# EAGLE board FlightControllerBoard (EAGLE 9.0.0), part 1 of 2
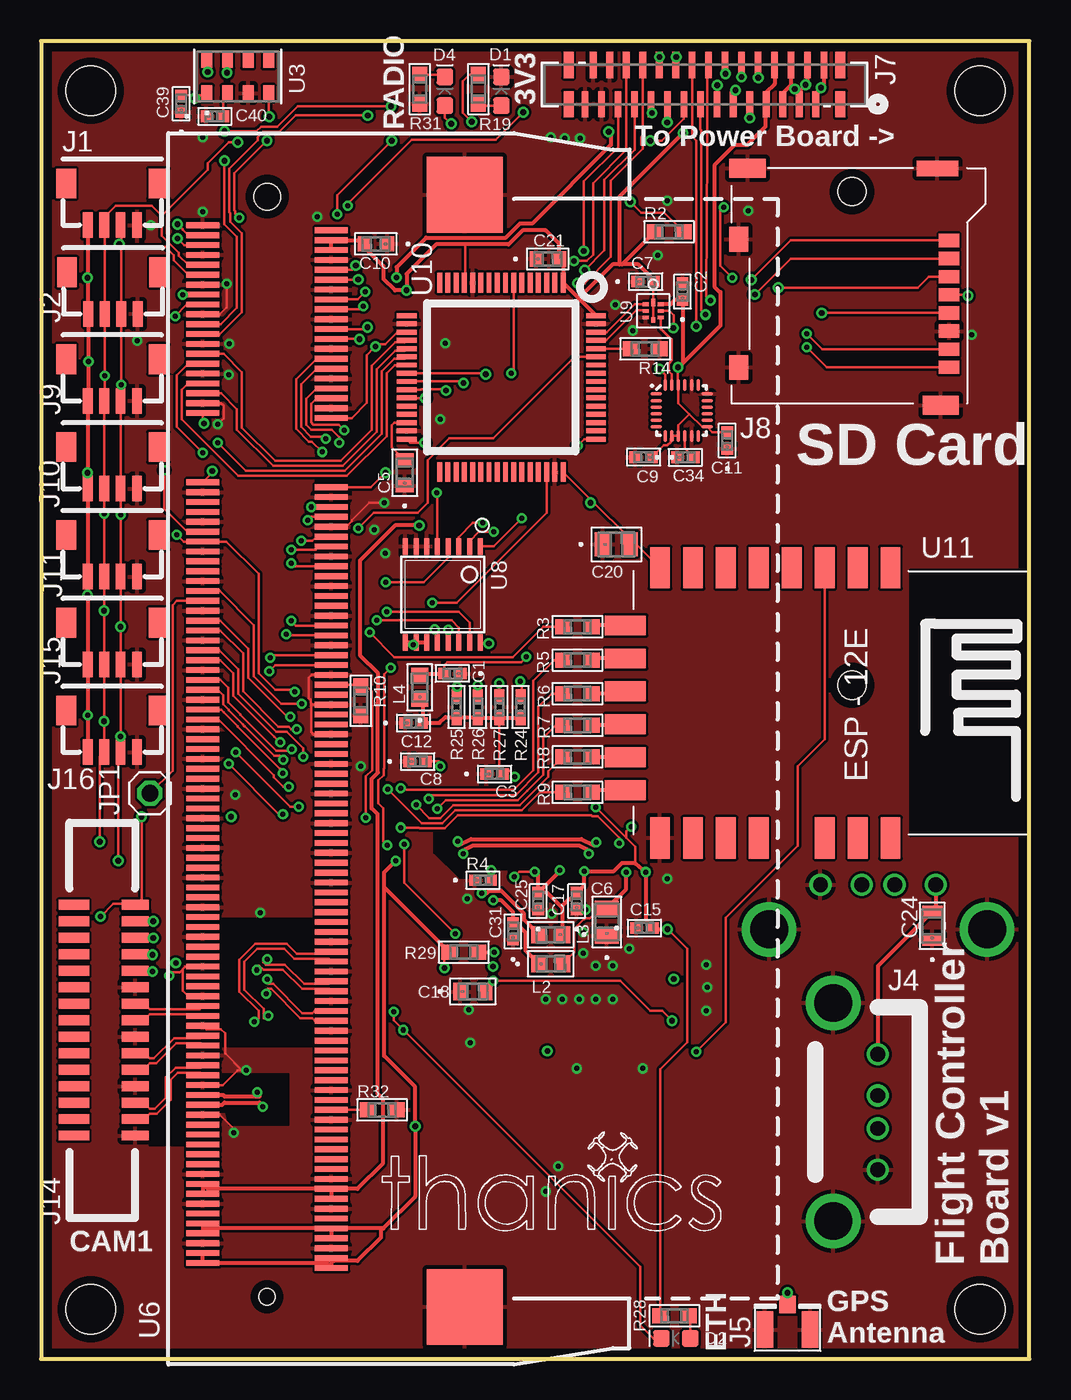
[diagram p0: board, top side]
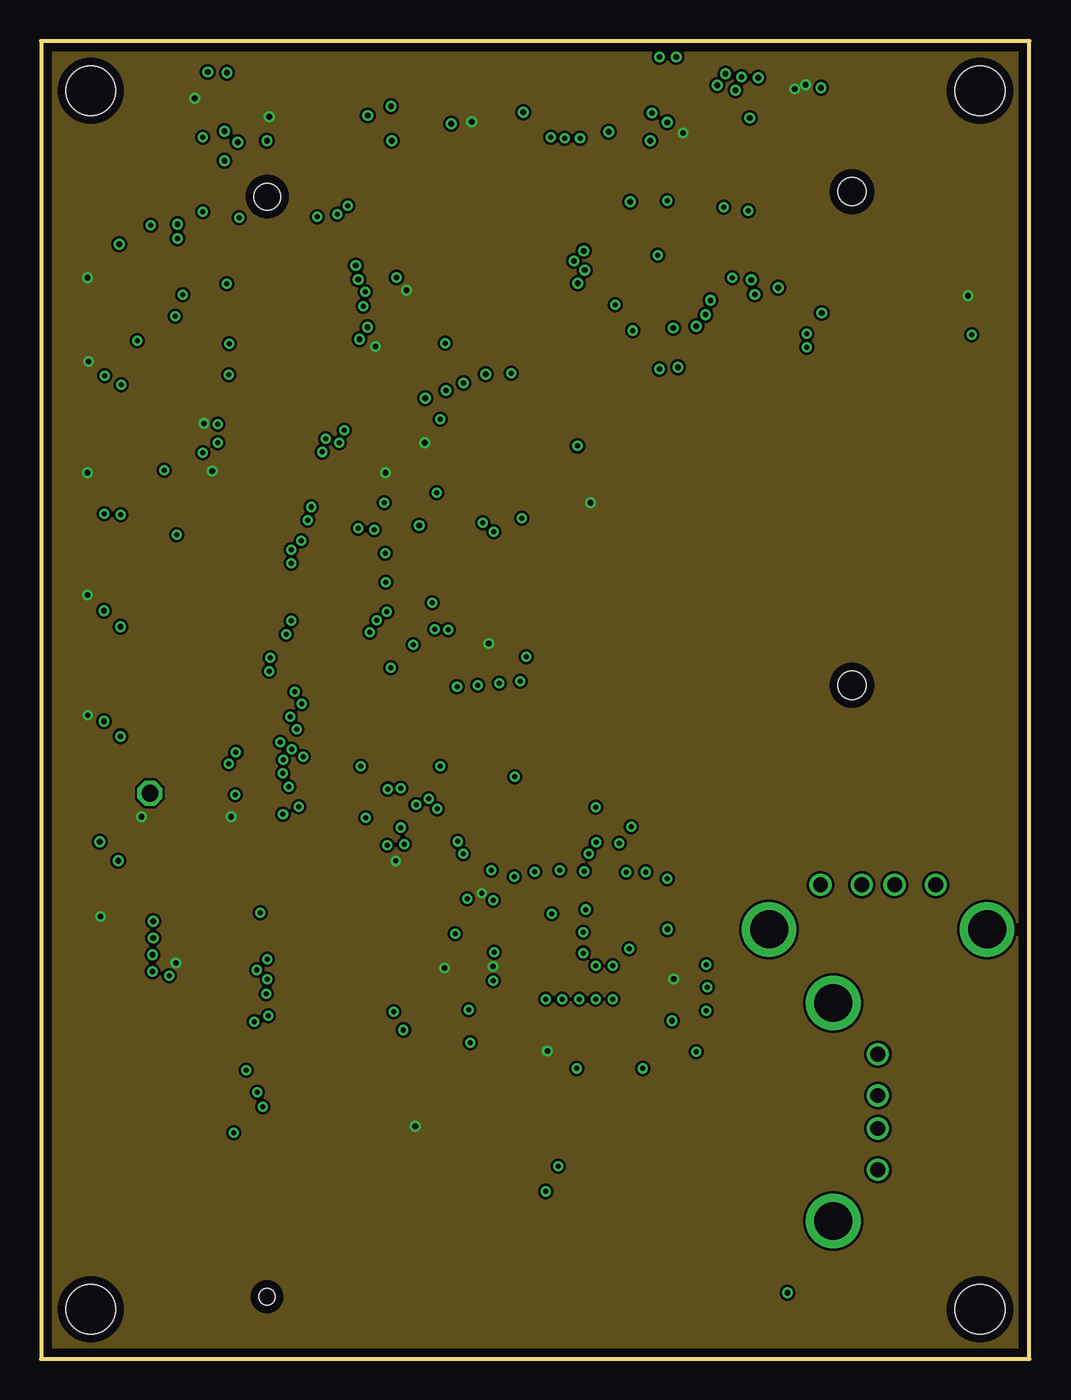
[diagram p1: board, inner layer Route2]
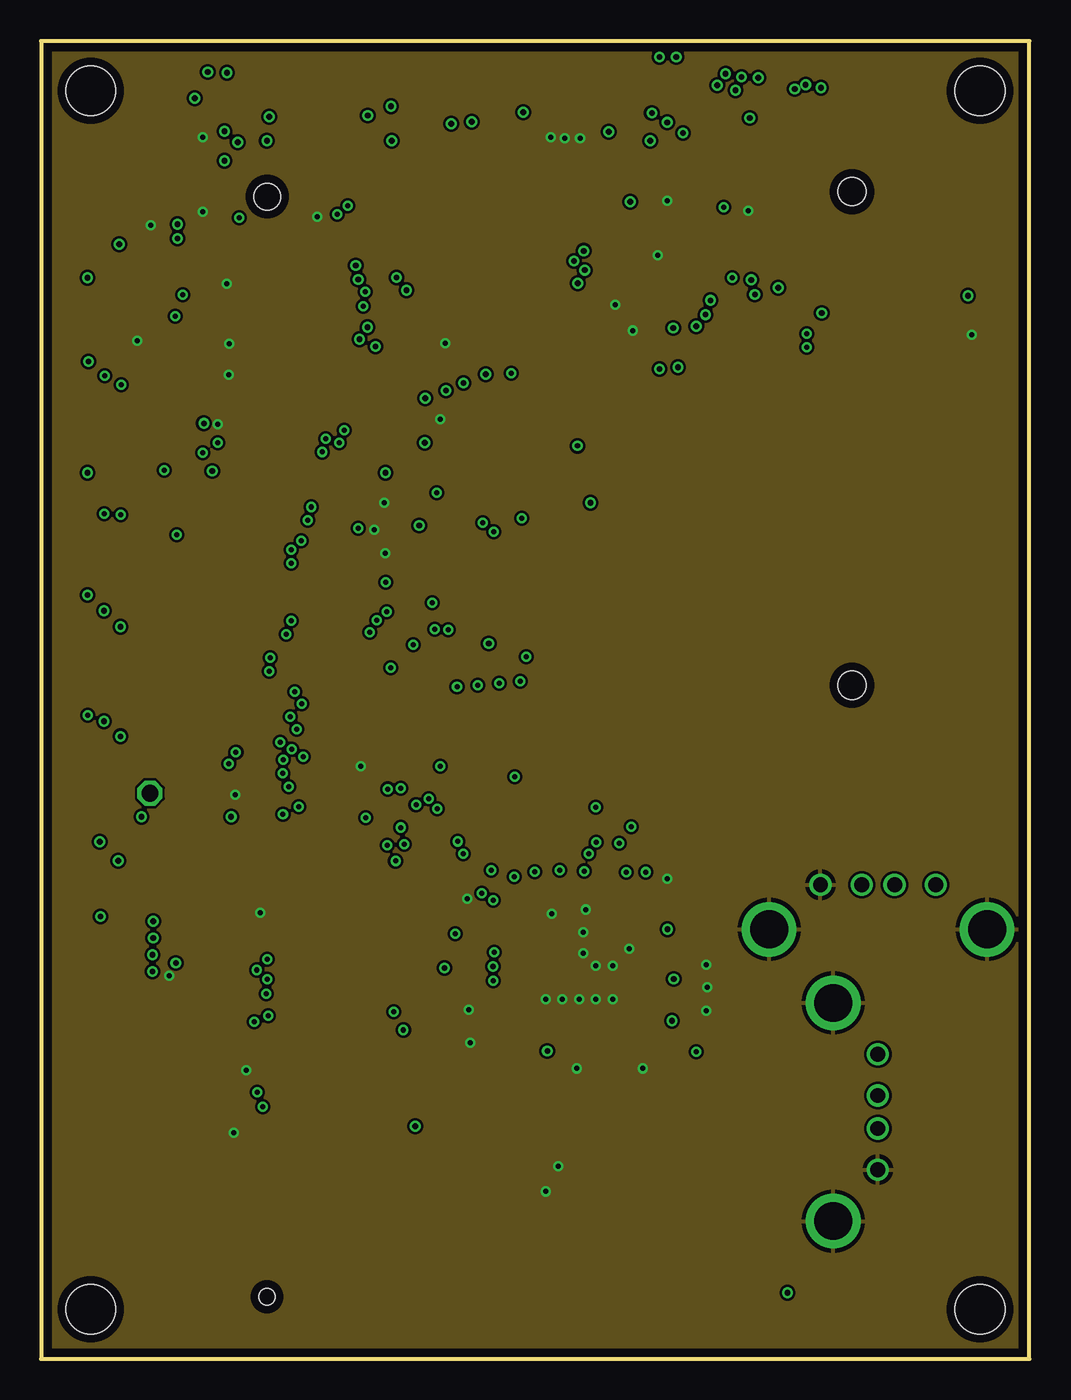
[diagram p2: board, inner layer Route15]
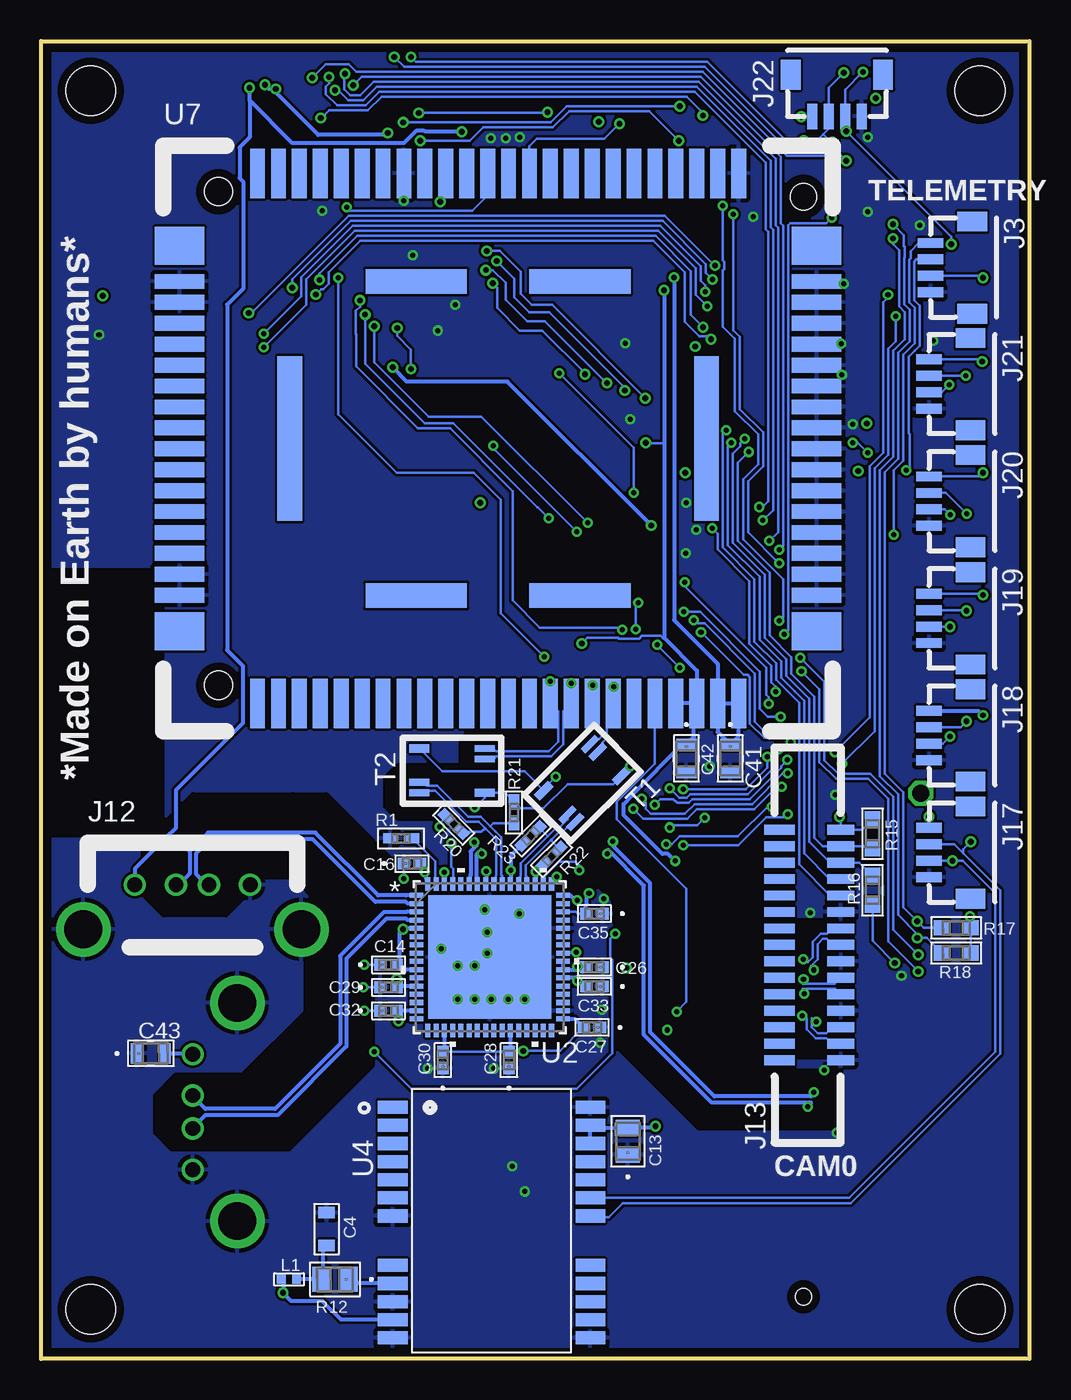
[diagram p3: board, bottom side, seen from below]

Size 60 x 80 mm. Coordinates in mm from the lower left corner, seen from the top.
Outline: 60,80 0,80 0,0 60,0 60,80
Copper layers (1*2*15*16): Top 0.035mm / dielectric 0.2mm / Route2 0.035mm / dielectric 1.2mm / Route15 0.035mm / dielectric 0.2mm / Bottom 0.035mm
Design rules "Elecrow_4-layer_PCB_eagle_rule": minimum track width 6mil, minimum drill 12mil, track to track 6mil, track to pad 6mil, pad to pad 6mil, via to via 8mil, smd to smd 0mil, copper to edge 20mil, drill to drill 10mil, minimum pad ring 6mil, minimum via ring 6mil, stop-mask expansion 0mil, vias tented up to drill 100mil, thermal gap 10mil
Holes 3 mm at 3,77 3,3 57,77 57,3

## Footprints (pad centres in the part's own frame; a part is rotated, then mirrored left to right if it is on the bottom)
0402-M = smd 0.711 x 0.711: 1 -0.508,0; 2 0.508,0
0603_CAPACITOR = smd 0.701 x 1.001: 1 -1.001,0; 2 1.001,0
0603-M = smd 0.813 x 1.067: 1 -0.775,0; 2 0.775,0
YAG_CC0805 = smd 0.965 x 1.448: 1 -0.826,0; 2 0.826,0
G-188-M = smd 0.813 x 0.914: 1 -0.699,0; 2 0.699,0
0805 = smd 0.965 x 1.448: 1 -0.826,0; 2 0.826,0
G-21 = smd 0.711 x 1.245: 1 -0.851,0; 2 0.851,0
LED-0603 = smd 1 x 1: A -0.877,0; C 0.877,0
JST_SH_4POS = smd 0.6 x 1.55: 1 -1.5,0; 2 -0.5,0; 3 0.5,0; 4 1.5,0 | smd 1.2 x 1.8: P$5 -2.8,2.525; P$6 2.8,2.525
USBA_RECEPT_VERT = drill 0.9: 1 -3.5,0; 2 -1,0; 3 1,0; 4 3.5,0 | drill 2.3: P$5 -6.62,-2.71; P$6 6.62,-2.71
U.FL = smd 2.2 x 1: P$1 0,1.375; P$2 0,-1.375 | smd 1.05 x 1: P$3 1.525,0
CON30_1X30_DUT_58XF = smd 0.406 x 1.6: 1 7.62,0.965; 2 7.12,-1.422; 3 6.62,0.965; 4 6.12,-1.422; 5 5.62,0.965; 6 5.12,-1.422; 7 4.62,0.965; 8 4.12,-1.422; 9 3.62,0.965; 10 3.12,-1.422; 11 2.62,0.965; 12 2.12,-1.422; 13 1.62,0.965; 14 1.12,-1.422; 15 0.62,0.965; 16 0.12,-1.422; 17 -0.38,0.965; 18 -0.88,-1.422; 19 -1.38,0.965; 20 -1.88,-1.422; 21 -2.38,0.965; 22 -2.88,-1.422; 23 -3.38,0.965; 24 -3.88,-1.422; 25 -4.38,0.965; 26 -4.88,-1.422; 27 -5.38,0.965; 28 -5.88,-1.422; 29 -6.38,0.965; 30 -6.88,-1.422 | smd 0.61 x 1.6: 31 -7.885,-1.422; 32 8.625,-1.422; 33 -7.885,0.965; 34 8.625,0.965
MICROSD = smd 0.8 x 1.24: 1 -4.4,0; 2 -3.3,0; 3 -2.2,0; 4 -1.1,0; 5 0,0; 6 1.1,0; 7 2.2,0; 8 3.3,0 | smd 0.95 x 2.5: 9 -8.775,-0.7 | smd 1.15 x 2.2: 10 5.615,-0.5; 11 -8.775,-12.23 | smd 1.5 x 1.15: 12 -4.47,-12.755; 13 3.31,-12.775
15POS_FFC_CONNECTOR = smd 0.6 x 1.65: 1 -6,-2; 2 -5,-2; 3 -4,-2; 4 -3,-2; 5 -2,-2; 6 -1,-2; 7 0,-2; 8 1,-2; 9 2,-2; 10 3,-2; 11 4,-2; 12 5,-2; 13 6,-2; 14 7,-2; 15 8,-2 | smd 0.6 x 1.85: P$16 -6,1.725; P$17 -5,1.725; P$18 -4,1.725; P$19 -3,1.725; P$20 -2,1.725; P$21 -1,1.725; P$22 0,1.725; P$23 1,1.725; P$24 2,1.725; P$25 3,1.725; P$26 4,1.725; P$27 5,1.725; P$28 6,1.725; P$29 7,1.725; P$30 8,1.725
1X01 = drill 1.016 octagon: 1 0,0
0402_INDUCTOR = smd 0.525 x 0.55: P$1 -0.463,0; P$2 0.463,0
IND_BLM18_0603-M = smd 0.914 x 1.041: 1 -0.724,0; 2 0.724,0
RC0402N-M = smd 0.864 x 0.61: 1 -0.66,0; 2 0.66,0
RC0603N-M = smd 0.965 x 0.914: 1 -0.876,0; 2 0.876,0
YAG_R0402-M = smd 0.66 x 0.66: 1 -0.508,0; 2 0.508,0
STA_RNCP0805-M = smd 1.118 x 1.499: 1 -0.826,0; 2 0.826,0
ALT4532 = smd 1.2 x 0.41: 1 -1.99,-1.35; 2 -1.99,-0.7; 4 1.99,1.35; 5 1.99,0.7 | smd 1.2 x 0.5: 3 -1.99,1.35; 6 1.99,-1.35
QFN40P300X300X105-25N = smd 0.7 x 0.2: 1 -1.55,1; 2 -1.55,0.6; 3 -1.55,0.2; 4 -1.55,-0.2; 5 -1.55,-0.6; 6 -1.55,-1; 13 1.55,-1; 14 1.55,-0.6; 15 1.55,-0.2; 16 1.55,0.2; 17 1.55,0.6; 18 1.55,1 | smd 0.2 x 0.7: 7 -1,-1.55; 8 -0.6,-1.55; 9 -0.2,-1.55; 10 0.2,-1.55; 11 0.6,-1.55; 12 1,-1.55; 19 1,1.55; 20 0.6,1.55; 21 0.2,1.55; 22 -0.2,1.55; 23 -0.6,1.55; 24 -1,1.55
QFN64_9X9MC-M = smd 0.813 x 0.305: 1 -4.445,3.75; 2 -4.445,3.25; 3 -4.445,2.75; 4 -4.445,2.25; 5 -4.445,1.75; 6 -4.445,1.25; 7 -4.445,0.75; 8 -4.445,0.25; 9 -4.445,-0.25; 10 -4.445,-0.75; 11 -4.445,-1.25; 12 -4.445,-1.75; 13 -4.445,-2.25; 14 -4.445,-2.75; 15 -4.445,-3.25; 16 -4.445,-3.75; 33 4.445,-3.75; 34 4.445,-3.25; 35 4.445,-2.75; 36 4.445,-2.25; 37 4.445,-1.75; 38 4.445,-1.25; 39 4.445,-0.75; 40 4.445,-0.25; 41 4.445,0.25; 42 4.445,0.75; 43 4.445,1.25; 44 4.445,1.75; 45 4.445,2.25; 46 4.445,2.75; 47 4.445,3.25; 48 4.445,3.75 | smd 0.305 x 0.813: 17 -3.75,-4.445; 18 -3.25,-4.445; 19 -2.75,-4.445; 20 -2.25,-4.445; 21 -1.75,-4.445; 22 -1.25,-4.445; 23 -0.75,-4.445; 24 -0.25,-4.445; 25 0.25,-4.445; 26 0.75,-4.445; 27 1.25,-4.445; 28 1.75,-4.445; 29 2.25,-4.445; 30 2.75,-4.445; 31 3.25,-4.445; 32 3.75,-4.445; 49 3.75,4.445; 50 3.25,4.445; 51 2.75,4.445; 52 2.25,4.445; 53 1.75,4.445; 54 1.25,4.445; 55 0.75,4.445; 56 0.25,4.445; 57 -0.25,4.445; 58 -0.75,4.445; 59 -1.25,4.445; 60 -1.75,4.445; 61 -2.25,4.445; 62 -2.75,4.445; 63 -3.25,4.445; 64 -3.75,4.445 | smd 7.493 x 7.493: 65 0,0
LGA8-M = smd 0.94 x 0.66: 1 -1.003,1.875; 2 -1.003,0.625; 3 -1.003,-0.625; 4 -1.003,-1.875; 5 1.003,-1.875; 6 1.003,-0.625; 7 1.003,0.625; 8 1.003,1.875
NEO-M8 = smd 1.8 x 0.8: 1 6.4,-7.4; 2 6.4,-6.3; 3 6.4,-5.2; 4 6.4,-4.1; 5 6.4,-3; 6 6.4,-1.9; 7 6.4,-0.8; 8 6.4,2.2; 9 6.4,3.3; 10 6.4,4.4; 11 6.4,5.5; 12 6.4,6.6; 13 -5.6,6.6; 14 -5.6,5.5; 15 -5.6,4.4; 16 -5.6,3.3; 17 -5.6,2.2; 18 -5.6,-0.8; 19 -5.6,-1.9; 20 -5.6,-3; 21 -5.6,-4.1; 22 -5.6,-5.2; 23 -5.6,-6.3; 24 -5.6,-7.4
SO-DIMM = smd 0.35 x 2: 1 -26.4,-3.9; 2 -26.1,3.9; 3 -25.8,-3.9; 4 -25.5,3.9; 5 -25.2,-3.9; 6 -24.9,3.9; 7 -24.6,-3.9; 8 -24.3,3.9; 9 -24,-3.9; 10 -23.7,3.9; 11 -23.4,-3.9; 12 -23.1,3.9; 13 -22.8,-3.9; 14 -22.5,3.9; 15 -22.2,-3.9; 16 -21.9,3.9; 17 -21.6,-3.9; 18 -21.3,3.9; 19 -21,-3.9; 20 -20.7,3.9; 21 -20.4,-3.9; 22 -20.1,3.9; 23 -19.8,-3.9; 24 -19.5,3.9; 25 -19.2,-3.9; 26 -18.9,3.9; 27 -18.6,-3.9; 28 -18.3,3.9; 29 -18,-3.9; 30 -17.7,3.9; 31 -17.4,-3.9; 32 -17.1,3.9; 33 -16.8,-3.9; 34 -16.5,3.9; 35 -16.2,-3.9; 36 -15.9,3.9; 37 -15.6,-3.9; 38 -15.3,3.9; 39 -15,-3.9; 40 -14.7,3.9; 41 -10.8,-3.9; 42 -10.5,3.9; 43 -10.2,-3.9; 44 -9.9,3.9; 45 -9.6,-3.9; 46 -9.3,3.9; 47 -9,-3.9; 48 -8.7,3.9; 49 -8.4,-3.9; 50 -8.1,3.9; 51 -7.8,-3.9; 52 -7.5,3.9; 53 -7.2,-3.9; 54 -6.9,3.9; 55 -6.6,-3.9; 56 -6.3,3.9; 57 -6,-3.9; 58 -5.7,3.9; 59 -5.4,-3.9; 60 -5.1,3.9; 61 -4.8,-3.9; 62 -4.5,3.9; 63 -4.2,-3.9; 64 -3.9,3.9; 65 -3.6,-3.9; 66 -3.3,3.9; 67 -3,-3.9; 68 -2.7,3.9; 69 -2.4,-3.9; 70 -2.1,3.9; 71 -1.8,-3.9; 72 -1.5,3.9; 73 -1.2,-3.9; 74 -0.9,3.9; 75 -0.6,-3.9; 76 -0.3,3.9; 77 0,-3.9; 78 0.3,3.9; 79 0.6,-3.9; 80 0.9,3.9; 81 1.2,-3.9; 82 1.5,3.9; 83 1.8,-3.9; 84 2.1,3.9; 85 2.4,-3.9; 86 2.7,3.9; 87 3,-3.9; 88 3.3,3.9; 89 3.6,-3.9; 90 3.9,3.9; 91 4.2,-3.9; 92 4.5,3.9; 93 4.8,-3.9; 94 5.1,3.9; 95 5.4,-3.9; 96 5.7,3.9; 97 6,-3.9; 98 6.3,3.9; 99 6.6,-3.9; 100 6.9,3.9; 101 7.2,-3.9; 102 7.5,3.9; 103 7.8,-3.9; 104 8.1,3.9; 105 8.4,-3.9; 106 8.7,3.9; 107 9,-3.9; 108 9.3,3.9; 109 9.6,-3.9; 110 9.9,3.9; 111 10.2,-3.9; 112 10.5,3.9; 113 10.8,-3.9; 114 11.1,3.9; 115 11.4,-3.9; 116 11.7,3.9; 117 12,-3.9; 118 12.3,3.9; 119 12.6,-3.9; 120 12.9,3.9; 121 13.2,-3.9; 122 13.5,3.9; 123 13.8,-3.9; 124 14.1,3.9; 125 14.4,-3.9; 126 14.7,3.9; 127 15,-3.9; 128 15.3,3.9; 129 15.6,-3.9; 130 15.9,3.9; 131 16.2,-3.9; 132 16.5,3.9; 133 16.8,-3.9; 134 17.1,3.9; 135 17.4,-3.9; 136 17.7,3.9; 137 18,-3.9; 138 18.3,3.9; 139 18.6,-3.9; 140 18.9,3.9; 141 19.2,-3.9; 142 19.5,3.9; 143 19.8,-3.9; 144 20.1,3.9; 145 20.4,-3.9; 146 20.7,3.9; 147 21,-3.9; 148 21.3,3.9; 149 21.6,-3.9; 150 21.9,3.9; 151 22.2,-3.9; 152 22.5,3.9; 153 22.8,-3.9; 154 23.1,3.9; 155 23.4,-3.9; 156 23.7,3.9; 157 24,-3.9; 158 24.3,3.9; 159 24.6,-3.9; 160 24.9,3.9; 161 25.2,-3.9; 162 25.5,3.9; 163 25.8,-3.9; 164 26.1,3.9; 165 26.4,-3.9; 166 26.7,3.9; 167 27,-3.9; 168 27.3,3.9; 169 27.6,-3.9; 170 27.9,3.9; 171 28.2,-3.9; 172 28.5,3.9; 173 28.8,-3.9; 174 29.1,3.9; 175 29.4,-3.9; 176 29.7,3.9; 177 30,-3.9; 178 30.3,3.9; 179 30.6,-3.9; 180 30.9,3.9; 181 31.2,-3.9; 182 31.5,3.9; 183 31.8,-3.9; 184 32.1,3.9; 185 32.4,-3.9; 186 32.7,3.9; 187 33,-3.9; 188 33.3,3.9; 189 33.6,-3.9; 190 33.9,3.9; 191 34.2,-3.9; 192 34.5,3.9; 193 34.8,-3.9; 194 35.1,3.9; 195 35.4,-3.9; 196 35.7,3.9; 197 36,-3.9; 198 36.3,3.9; 199 36.6,-3.9; 200 36.9,3.9 | smd 4.6 x 4.6: G1 -28.254,12; G2 39.27,12 | hole 1.6: -28.15,0 | hole 0.965: 38.65,0
PDDL2450_SOCKET = smd 0.9 x 3: 1 14.605,16.09; 2 13.335,16.09; 3 12.065,16.09; 4 10.795,16.09; 5 9.525,16.09; 6 8.255,16.09; 7 6.985,16.09; 8 5.715,16.09; 9 4.445,16.09; 10 3.175,16.09; 11 1.905,16.09; 12 0.635,16.09; 13 -0.635,16.09; 14 -1.905,16.09; 15 -3.175,16.09; 16 -4.445,16.09; 17 -5.715,16.09; 18 -6.985,16.09; 19 -8.255,16.09; 20 -9.525,16.09; 21 -10.795,16.09; 22 -12.065,16.09; 23 -13.335,16.09; 24 -14.605,16.09; 41 -14.605,-16.09; 42 -13.335,-16.09; 43 -12.065,-16.09; 44 -10.795,-16.09; 45 -9.525,-16.09; 46 -8.255,-16.09; 47 -6.985,-16.09; 48 -5.715,-16.09; 49 -4.445,-16.09; 50 -3.175,-16.09; 51 -1.905,-16.09; 52 -0.635,-16.09; 53 0.635,-16.09; 54 1.905,-16.09; 55 3.175,-16.09; 56 4.445,-16.09; 57 5.715,-16.09; 58 6.985,-16.09; 59 8.255,-16.09; 60 9.525,-16.09; 61 10.795,-16.09; 62 12.065,-16.09; 63 13.335,-16.09; 64 14.605,-16.09 | smd 3 x 0.9: 25 -19.34,9.53; 26 -19.34,8.26; 27 -19.34,6.99; 28 -19.34,5.72; 29 -19.34,4.45; 30 -19.34,3.18; 31 -19.34,1.91; 32 -19.34,0.64; 33 -19.34,-0.63; 34 -19.34,-1.9; 35 -19.34,-3.17; 36 -19.34,-4.44; 37 -19.34,-5.71; 38 -19.34,-6.98; 39 -19.34,-8.25; 40 -19.34,-9.52; 65 19.34,-9.52; 66 19.34,-8.25; 67 19.34,-6.98; 68 19.34,-5.71; 69 19.34,-4.44; 70 19.34,-3.17; 71 19.34,-1.9; 72 19.34,-0.63; 73 19.34,0.64; 74 19.34,1.91; 75 19.34,3.18; 76 19.34,4.45; 77 19.34,5.72; 78 19.34,6.99; 79 19.34,8.26; 80 19.34,9.53 | smd 1.5 x 10: EP1 -12.65,0; EP2 12.65,0 | smd 6.15 x 1.5: EP3 -4.975,9.53; EP4 4.975,9.53; EP5 -4.975,-9.53; EP6 4.975,-9.53 | smd 3 x 2.3: P$7 -19.34,11.7; P$8 -19.34,-11.7; P$9 19.34,11.7; P$10 19.34,-11.7 | hole 1.7: -16.97,14.985; -16.97,-14.985
TSSOP16 = smd 0.305 x 0.991: 1 -2.275,-2.918; 2 -1.625,-2.918; 3 -0.975,-2.918; 4 -0.325,-2.918; 5 0.325,-2.918; 6 0.975,-2.918; 7 1.625,-2.918; 8 2.275,-2.918; 9 2.275,2.918; 10 1.625,2.918; 11 0.975,2.918; 12 0.325,2.918; 13 -0.325,2.918; 14 -0.975,2.918; 15 -1.625,2.918; 16 -2.275,2.918
8-UMLP = smd 0.45 x 0.22: 1 -0.5,0 | smd 0.22 x 0.35: 2 -0.4,-0.45; 3 0,-0.45; 4 0.4,-0.45; 6 0.4,0.45; 7 0,0.45; 8 -0.4,0.45 | smd 0.35 x 0.22: 5 0.55,0
LQFP64 = smd 1.2 x 0.3: 1 -5.75,3.75; 2 -5.75,3.25; 3 -5.75,2.75; 4 -5.75,2.25; 5 -5.75,1.75; 6 -5.75,1.25; 7 -5.75,0.75; 8 -5.75,0.25; 9 -5.75,-0.25; 10 -5.75,-0.75; 11 -5.75,-1.25; 12 -5.75,-1.75; 13 -5.75,-2.25; 14 -5.75,-2.75; 15 -5.75,-3.25; 16 -5.75,-3.75; 33 5.75,-3.75; 34 5.75,-3.25; 35 5.75,-2.75; 36 5.75,-2.25; 37 5.75,-1.75; 38 5.75,-1.25; 39 5.75,-0.75; 40 5.75,-0.25; 41 5.75,0.25; 42 5.75,0.75; 43 5.75,1.25; 44 5.75,1.75; 45 5.75,2.25; 46 5.75,2.75; 47 5.75,3.25; 48 5.75,3.75 | smd 0.3 x 1.2: 17 -3.75,-5.75; 18 -3.25,-5.75; 19 -2.75,-5.75; 20 -2.25,-5.75; 21 -1.75,-5.75; 22 -1.25,-5.75; 23 -0.75,-5.75; 24 -0.25,-5.75; 25 0.25,-5.75; 26 0.75,-5.75; 27 1.25,-5.75; 28 1.75,-5.75; 29 2.25,-5.75; 30 2.75,-5.75; 31 3.25,-5.75; 32 3.75,-5.75; 49 3.75,5.75; 50 3.25,5.75; 51 2.75,5.75; 52 2.25,5.75; 53 1.75,5.75; 54 1.25,5.75; 55 0.75,5.75; 56 0.25,5.75; 57 -0.25,5.75; 58 -0.75,5.75; 59 -1.25,5.75; 60 -1.75,5.75; 61 -2.25,5.75; 62 -2.75,5.75; 63 -3.25,5.75; 64 -3.75,5.75
ESP12E-SMD = smd 2.5 x 1.2: ADC -8.3,3.8; CH_PD -8.3,1.8; GND 8.1,-8.2; GPIO0 8.1,-2.2; GPIO2 8.1,-4.2; GPIO5 8.1,1.8; GPIO12 -8.3,-4.2; GPIO13 -8.3,-6.2; GPIO14 -8.3,-2.2; GPIO15 8.1,-6.2; GPIO16 -8.3,-0.2; RESET -8.3,5.8; RXD0 8.1,3.8; TXD0 8.1,5.8; VCC -8.3,-8.2 | smd 1.2 x 2.5: CS0 -4.8,-10.3; GPIO9 -0.8,-10.3; GPIO10 1.2,-10.3; MISO -2.8,-10.3; MOSI 3.2,-10.3; SCLK 5.2,-10.3

## Placement (x,y rotation side)
C1  0.1uF  [0402-M]  24.97,41.61 180 top
C2  0.1uF  [0402-M]  38.94,64.8 90 top
C3  0.1uF  [0402-M]  27.53,35.51 0 top
C4  10nF  [0603_CAPACITOR]  42.67,7.87 270 bottom
C5  4.7uF  [0603-M]  22.07,53.8 90 top
C6  1uF  [YAG_CC0805]  34.34,26.52 90 top
C7  0.1uF  [0402-M]  36.7,65.41 0 top
C8  0.1uF  [0402-M]  22.86,36.27 0 top
C9  0.1uF  [0402-M]  36.58,54.74 180 top
C10  2.2uF  [G-188-M]  20.32,67.69 180 top
C11  0.1uF  [0402-M]  41.66,55.75 90 top
C12  0.1uF  [0402-M]  22.61,38.61 0 top
C13  0.1uF  [0805]  24.38,13.21 90 bottom
C14  0.1uF  [0402-M]  38.91,23.93 0 bottom
C15  0.1uF  [0402-M]  36.63,26.16 0 top
C16  0.1uF  [0402-M]  37.49,30.07 0 bottom
C17  0.1uF  [0402-M]  32.51,27.79 90 top
C18  4.7uF  [0603-M]  26.21,22.3 0 top
C20  0.1uF  [0805]  34.92,49.45 0 top
C21  2.2uF  [G-188-M]  30.76,66.78 0 top
C24  22uF  [G-21]  54.1,26.29 90 top
C25  0.1uF  [0402-M]  30.18,27.79 90 top
C26  0.1uF  [0402-M]  26.42,23.77 180 bottom
C27  0.1uF  [0402-M]  26.57,20.12 180 bottom
C28  0.1uF  [0402-M]  31.6,18.14 90 bottom
C29  0.1uF  [0402-M]  38.91,22.56 0 bottom
C30  0.1uF  [0402-M]  35.61,18.14 90 bottom
C31  0.1uF  [0402-M]  28.65,25.96 90 top
C32  0.1uF  [0402-M]  38.91,21.13 0 bottom
C33  0.1uF  [0402-M]  26.42,22.61 180 bottom
C34  0.1uF  [0402-M]  39.12,54.74 0 top
C35  0.1uF  [0402-M]  26.42,27.03 180 bottom
C39  0.1uF  [0402-M]  8.51,76.2 90 top
C40  0.1uF  [0402-M]  10.54,75.44 0 top
C41  22uF  [G-21]  18.16,36.45 270 bottom
C42  10uF  [G-21]  20.83,36.45 270 bottom
C43  22uF  [G-21]  53.34,18.54 0 bottom
D1  GREEN  [LED-0603]  27.94,76.96 90 top
D2  GREEN  [LED-0603]  38.53,1.24 180 top
D4  GREEN  [LED-0603]  24.51,76.96 90 top
J1  [JST_SH_4POS]  4.32,68.83 0 top
J2  [JST_SH_4POS]  4.37,63.45 0 top
J3  [JST_SH_4POS]  5.99,66.25 270 bottom
J4  UE27AE54100  [USBA_RECEPT_VERT]  50.8,14.99 270 top
J5  U.FL  [U.FL]  45.31,1.78 90 top
J7  62674-301121ALF  [CON30_1X30_DUT_58XF]  39.9,77.6 0 top
J8  MICROSD  [MICROSD]  55.12,63.5 270 top
J9  [JST_SH_4POS]  4.32,58.17 0 top
J10  [JST_SH_4POS]  4.32,52.83 0 top
J11  [JST_SH_4POS]  4.32,47.5 0 top
J12  UE27AE54100  [USBA_RECEPT_VERT]  50.82,28.79 0 bottom
J13  [15POS_FFC_CONNECTOR]  13.46,24.13 90 bottom
J14  [15POS_FFC_CONNECTOR]  3.71,19.56 90 top
J15  [JST_SH_4POS]  4.32,42.16 0 top
J16  [JST_SH_4POS]  4.32,36.83 0 top
J17  [JST_SH_4POS]  6.1,30.73 270 bottom
J18  [JST_SH_4POS]  6.1,37.85 270 bottom
J19  [JST_SH_4POS]  6.1,44.96 270 bottom
J20  [JST_SH_4POS]  6.1,52.07 270 bottom
J21  [JST_SH_4POS]  6.1,59.18 270 bottom
J22  [JST_SH_4POS]  11.68,75.44 0 bottom
JP1  [1X01]  6.6,34.34 90 top
L1  27 nH  [0402_INDUCTOR]  44.96,4.83 0 bottom
L2  FB  [IND_BLM18_0603-M]  30.94,23.98 0 top
L3  FB  [IND_BLM18_0603-M]  30.94,25.76 180 top
L4  1k@100MHz  [IND_BLM18_0603-M]  22.99,40.77 90 top
R1  12k  [RC0402N-M]  38.15,31.6 180 bottom
R2  10k  [RC0603N-M]  38.13,68.43 0 top
R3  20R  [RC0603N-M]  32.56,44.45 180 top
R4  12.4k  [YAG_R0402-M]  26.82,29.06 0 top
R5  20R  [RC0603N-M]  32.56,42.42 180 top
R6  20R  [RC0603N-M]  32.56,40.39 180 top
R7  20R  [RC0603N-M]  32.56,38.46 180 top
R8  20R  [RC0603N-M]  32.56,36.55 180 top
R9  20R  [RC0603N-M]  32.56,34.39 180 top
R10  10k  [RC0603N-M]  19.41,39.95 270 top
R12  10R  [STA_RNCP0805-M]  42.16,4.83 180 bottom
R14  10k  [RC0603N-M]  36.68,61.32 180 top
R15  1k  [RC0603N-M]  9.53,31.88 270 bottom
R16  1k  [RC0603N-M]  9.53,28.45 90 bottom
R17  1k  [RC0603N-M]  4.45,26.16 180 bottom
R18  1k  [RC0603N-M]  4.45,24.64 180 bottom
R19  1k  [RC0603N-M]  26.54,77.09 90 top
R20  49R9  [RC0402N-M]  34.95,32.46 315 bottom
R21  49R9  [RC0402N-M]  31.29,33.17 270 bottom
R22  49R9  [RC0402N-M]  29.01,30.51 45 bottom
R23  49R9  [RC0402N-M]  30.28,31.75 45 bottom
R24  49R9  [RC0402N-M]  29.11,39.57 90 top
R25  49R9  [RC0402N-M]  25.22,39.57 90 top
R26  49R9  [RC0402N-M]  26.52,39.57 90 top
R27  49R9  [RC0402N-M]  27.81,39.57 90 top
R28  1k  [RC0603N-M]  38.46,2.62 180 top
R29  10k  [RC0603N-M]  25.65,24.69 180 top
R31  1k  [RC0603N-M]  22.99,77.09 270 top
R32  10k  [RC0603N-M]  20.7,15.11 0 top
T1  ALT4532M  [ALT4532]  27.13,34.95 225 bottom
T2  ALT4532M  [ALT4532]  35.05,35.71 180 bottom
U1  [QFN40P300X300X105-25N]  38.89,57.58 0 top
U2  [QFN64_9X9MC-M]  32.77,24.38 0 bottom
U3  MPL115A2  [LGA8-M]  11.94,77.85 90 top
U4  NEO-M8  [NEO-M8]  32.26,7.87 180 bottom
U6  [SO-DIMM]  13.72,42.42 270 top
U7  PDDL2450  [PDDL2450_SOCKET]  32.26,55.88 0 bottom
U8  74HC4053  [TSSOP16]  24.38,46.41 180 top
U9  [8-UMLP]  37.16,63.63 270 top
U10  [LQFP64]  27.94,59.59 270 top
U11  [ESP12E-SMD]  45.77,39.73 270 top

## Library data of the parts
C1-C3 C7-C9 C11 C12 C14-C17 C25-C35 C39 C40 = 0.1uF-capacitor-0402; MANUFACTURER_PART_NUMBER: 0402ZD104KAT2A; VENDOR: AVX Corporation
C4 J1-J4 J8-J22 L1 T1 T2 U7-U10 = thanics_robotics
C5 C18 = 4.7uF-capacitor; MANUFACTURER_PART_NUMBER: 06036D475KAT2A; VENDOR: AVX Corporation
C6 = 1uF X7R Ceramic Capacitor; COPYRIGHT: Copyright C 2015 Accelerated Designs. All rights reserved; MANUFACTURER_PART_NUMBER: CC0805KKX7R7BB105; VENDOR: Vendor
C10 C21 = 2.2uF X5R Capacitor; COPYRIGHT: Copyright C 2015 Accelerated Designs. All rights reserved; MANUFACTURER_PART_NUMBER: GRM188R61C225KE15J; VENDOR: Vendor
C13 C20 = 0.1uF X7R Ceramic Capacitor; COPYRIGHT: Copyright C 2015 Accelerated Designs. All rights reserved; MANUFACTURER_PART_NUMBER: 08055C104KAT2A; VENDOR: Vendor
C24 C41 C43 = 22uF X5R Ceramic Capacitor; COPYRIGHT: Copyright C 2015 Accelerated Designs. All rights reserved; MANUFACTURER_PART_NUMBER: GRM21BR60J226ME39L; VENDOR: Vendor
C42 = 10uF X5R Ceramic Capacitor; COPYRIGHT: Copyright C 2015 Accelerated Designs. All rights reserved; MANUFACTURER_PART_NUMBER: GRM21BR60J106ME19L; VENDOR: Vendor
D1 D2 D4 = SparkFun-LED; PROD_ID: DIO-00821
J5 = SparkFun-Connectors; PROD_ID: CONN-09193; SF_ID: WRL-09144
J7 = 30pin_ffc_connector; MANUFACTURER_PART_NUMBER: 62674301121ALF; VENDOR: FCI
JP1 = pinhead
L2-L4 = 600ohm-fb; MANUFACTURER_PART_NUMBER: BLM18AG601SN1D; VENDOR: MURATA
R1 = 12k-resistor; MANUFACTURER_PART_NUMBER: RC0402FR0712KL; VENDOR: Yageo
R2 R10 R14 R29 R32 = 10k-resistor(0603); MANUFACTURER_PART_NUMBER: RC0603JR0710KL; VENDOR: Yageo
R3 R5-R9 = 20-resistor; MANUFACTURER_PART_NUMBER: RC0603JR0720RL; VENDOR: Yageo
R4 = 12.4k-resistor; MANUFACTURER_PART_NUMBER: RC0402FR0712K4L; VENDOR: Yageo
R12 = 10-resistor; COPYRIGHT: Copyright C 2015 Accelerated Designs. All rights reserved; MANUFACTURER_PART_NUMBER: RNCP0805FTD10R0; VENDOR: Vendor
R15-R19 R28 R31 = 1k-resistor; CASE: 0603 1608 metric; COMPOSITION: Thick Film; COPYRIGHT: Copyright C 2015 Accelerated Designs. All rights reserved; DATASHEET: httpwww.yageo.comdocumentsrecentPYuRC0603_51_RoHS_L_4.pdf; DESCRIPTION: RES 1.0K OHM 110W 5% 0603 SMD; DIGIKEYPARTNUMBER: 3111.0KGRTRND; HEIGHT: 0.022" 0.55mm; LEADSTYLE: Surface Mount SMD SMT; MANUFACTURER_PART_NUMBER: RC0603JR071KL; NEWARKPARTNUMBER: 14M7231; NUMBEROFTERMINATIONS: 2; PACKAGECASE: 0603 1608 Metric; PACKAGING: Tape &amp Reel TR; POWERWATTS: 0.1W 110W; QUANTITY_AVAILABLE: 0; RESISTANCEINOHMS: 1.00K; RESISTANCEOHMS: 1K; SIZEDIMENSION: 0.063" L x 0.031" W 1.60mm x 0.80mm; TEMPERATURECOEFFICIENT: 100ppm°C; TOLERANCE: 5%; VENDOR: Yageo; VOLTAGEWORKING: 50V
R20-R27 = 49.9-resistor; MANUFACTURER_PART_NUMBER: RC0402FR0749K9L; VENDOR: Yageo
U1 = ICM-20948-mpu
U2 = lan9512; MANUFACTURER_PART_NUMBER: LAN9512JZX; VENDOR: MICROCHIP
U3 = mpl115a1-barometer
U4 = ubloxLib
U6 = raspberrypi_cm
U11 = esp8266modules

## Nets
1.8V: C2.1 C9.1 C11.2 J7.7 J7.8 U1.8 U1.9 U1.13 U1.22 U6.183 U6.184 U6.185 U6.186 U9.8
3.3V_A: C8.2 C14.2 C15.2 C16.2 C17.2 C25.2 L3.1 R20.1 R21.1 R22.1 R23.1 R28.2 T1.3 T2.3 U2.5 U2.10 U2.49 U2.51 U2.54 U2.57 U2.64
+3V3: C7.2 C10.2 C13.2 C20.2 C21.2 C26.2 C27.2 C28.2 C29.2 C30.2 C35.2 C39.2 C42.1 J1.1 J2.1 J3.3 J7.3 J7.4 J7.5 J7.6 J8.4 J9.1 J10.1 J11.1 J13.15 J14.15 J15.1 J16.1 J17.1 J18.1 J19.1 J20.1 J21.1 J22.1 L3.2 R2.1 R15.1 R16.1 R17.1 R18.1 R19.2 R29.2 U2.11 U2.12 U2.19 U2.27 U2.33 U2.39 U2.40 U2.46 U3.1 U3.4 U4.22 U4.23 U6.4 U6.6 U6.39 U6.40 U6.41 U6.42 U6.191 U6.192 U6.193 U6.194 U6.197 U6.198 U6.199 U6.200 U7.61 U7.62 U8.16 U9.1 U9.5 U10.1 U10.13 U10.19 U10.32 U10.48 U10.64 U11.VCC
+5V: C24.2 C41.1 C43.2 J4.1 J7.1 J7.2 J12.1 U7.63 U7.64
C0_C_N: J13.8 U6.144
C0_C_P: J13.9 U6.142
C0_D0_N: J13.2 U6.138
C0_D0_P: J13.3 U6.136
C0_D1_N: J13.5 U6.150
C0_D1_P: J13.6 U6.148
C0_IO0: J13.11 U6.36
C0_IO1: J13.12 U6.34
C1_C_N: J14.8 U6.149
C1_C_P: J14.9 U6.147
C1_D0_N: J14.2 U6.161
C1_D0_P: J14.3 U6.159
C1_D1_N: J14.5 U6.155
C1_D1_P: J14.6 U6.153
C1_IO0: J14.11 U6.78
C1_IO1: J14.12 U6.76
EMMC_DISABLE_N: U6.2
ETH_BIAS: C1.2 L4.2 U7.13
GEAR: JP1.1 U6.65
GND: C1.1 C2.2 C3.1 C4.1 C5.1 C6.1 C7.1 C8.1 C9.2 C10.1 C11.1 C12.1 C13.1 C14.1 C15.1 C16.1 C17.1 C18.1 C20.1 C21.1 C24.1 C25.1 C26.1 C27.1 C28.1 C29.1 C30.1 C31.1 C32.1 C33.1 C34.1 C35.1 C39.1 C40.1 C41.2 C42.2 C43.1 D1.C J1.4 J2.4 J3.4 J4.4 J4.P$5 J4.P$6 J5.P$1 J5.P$2 J7.27 J7.28 J7.29 J7.30 J8.6 J8.9 J8.10 J8.11 J8.12 J8.13 J9.4 J10.4 J11.4 J12.4 J12.P$5 J12.P$6 J13.1 J13.4 J13.7 J13.10 J14.1 J14.4 J14.7 J14.10 J15.4 J16.4 J17.4 J18.4 J19.4 J20.4 J21.4 J22.4 R1.2 R4.1 R10.2 R14.1 R31.2 R32.2 U1.11 U1.18 U1.20 U2.34 U2.44 U2.65 U3.3 U4.7 U4.10 U4.12 U4.13 U4.24 U6.1 U6.7 U6.8 U6.13 U6.14 U6.19 U6.20 U6.25 U6.26 U6.31 U6.32 U6.37 U6.38 U6.43 U6.44 U6.49 U6.50 U6.55 U6.56 U6.61 U6.62 U6.67 U6.68 U6.73 U6.74 U6.79 U6.80 U6.85 U6.86 U6.91 U6.92 U6.97 U6.98 U6.103 U6.104 U6.109 U6.110 U6.115 U6.116 U6.121 U6.122 U6.127 U6.133 U6.134 U6.139 U6.140 U6.145 U6.146 U6.151 U6.152 U6.157 U6.163 U6.164 U6.169 U6.170 U6.181 U6.182 U6.187 U6.188 U6.195 U6.196 U6.G1 U6.G2 U7.1 U7.17 U7.25 U7.26 U7.39 U7.40 U7.65 U7.66 U7.67 U7.68 U7.69 U7.70 U7.71 U7.72 U7.73 U7.74 U7.75 U7.76 U7.77 U7.78 U7.79 U7.80 U8.6 U8.7 U8.8 U9.4 U10.12 U10.18 U10.31 U10.47 U10.63 U11.GND
GND1: D2.C U7.60
GPCLK1: R10.1 U2.61 U6.82
GPIO12: U6.45
GPIO13: U6.47
GPIO16: U6.57
GPIO17: U6.59
GPIO37: U6.60
GPIO38: U6.64
GPIO39: U6.66
I2C_MPU_SCL: U9.3 U10.61
I2C_MPU_SDA: U9.2 U10.62
I2C_SCL: J1.3 J2.3 J7.20 J9.3 J10.3 J11.3 J15.3 J16.3 J17.3 J18.3 J19.3 J20.3 J21.3 J22.3 U3.8 U4.19 U6.11
I2C_SCL_1V8: U1.23 U9.6
I2C_SDA: J1.2 J2.2 J7.19 J9.2 J10.2 J11.2 J15.2 J16.2 J17.2 J18.2 J19.2 J20.2 J21.2 J22.2 U3.7 U4.18 U6.9
I2C_SDA_1V8: U1.24 U9.7
ID_SD: U6.15 U11.CH_PD
MISO: J7.13 U6.52
MOSI: J7.12 U6.48
N$1: J5.P$3 L1.P$1 U4.11
N$2: C34.2 U1.10
N$3: R29.1 U2.41
N$4: D1.A R19.1
N$5: R1.1 U2.63
N$6: C40.2 U3.2
N$7: R3.1 U11.CS0
N$8: R5.1 U11.MISO
N$9: R6.1 U11.GPIO9
N$10: R7.1 U11.GPIO10
N$11: C5.2 U10.30
N$12: D2.A R28.1
N$13: R12.1 U4.9
N$14: R8.1 U11.MOSI
N$15: R9.1 U11.SCLK
N$16: R14.2 U10.60
N$18: C31.2 L2.1 U2.48
N$19: C6.2 L2.2 U2.62
N$20: R4.2 U2.50
N$21: C18.2 C32.2 C33.2 U2.15 U2.38
N$23: C3.2 C12.2 L4.1 R24.1 R25.1 R26.1 R27.1 T1.6 T2.6
N$24: R2.2 U7.15
N$25: D4.A U7.11
N$26: C4.2 L1.P$2 R12.2
N$27: D4.C R31.1
N$53: R32.1 U6.168
NRST: U6.63 U8.4
NRST1: U8.5 U10.7
NRST2: J7.17 U8.3
PWM: J7.23 U10.24
PWM2: J7.24 U10.25
PWM3: J7.25 U10.26
PWM4: J7.26 U10.27
PWR_EN: J7.18 U6.58
RST: J7.11 U6.46
RX_LAN_N: R26.2 T1.1 U7.57
RX_LAN_P: R25.2 T1.2 U7.58
RX_N: R23.2 T1.5 U2.53
RX_P: R22.2 T1.4 U2.52
SCK: J7.14 U6.54
SCL0: J13.13 R16.2 U6.30
SCL1: J14.13 R18.2 U6.5
SD_CLK: R9.2 U6.75
SD_CMD: R3.2 U6.77
SD_D0: R5.2 U6.81
SD_D1: R8.2 U6.83
SD_D2: R6.2 U6.87
SD_D3: R7.2 U6.89
SDA0: J13.14 R15.2 U6.28
SDA1: J14.14 R17.2 U6.3
SDX_CLK: J8.5 U6.10
SDX_CMD: J8.3 U6.12
SDX_D0: J8.7 U6.16
SDX_D1: J8.8 U6.18
SDX_D2: J8.1 U6.22
SDX_D3: J8.2 U6.24
SEL0: J7.9 U6.21
SEL1: J7.10 U6.23
SEL2: U6.17 U8.9 U8.10 U8.11
SPI_CS0: U6.27 U10.20
SPI_MISO: U6.29 U10.22
SPI_MOSI: U6.33 U10.23
SPI_SCLK: U6.35 U10.21
SWCLK: U6.69 U8.15
SWCLK1: U8.2 U10.49
SWCLK2: J7.16 U8.1
SWDIO: U6.71 U8.14
SWDIO1: U8.12 U10.46
SWDIO2: J7.15 U8.13
TX_LAN_N: R27.2 T2.2 U7.56
TX_LAN_P: R24.2 T2.1 U7.55
TX_N: R20.2 T2.4 U2.56
TX_P: R21.2 T2.5 U2.55
UART2_RX: J7.21 U6.72
UART2_TX: J7.22 U6.70
USART1_RX: J3.1 U6.53 U10.59
USART1_TX: J3.2 U6.51
USB_D2_N: J12.2 U2.1
USB_D2_P: J12.3 U2.2
USB_D3_N: J4.2 U2.3
USB_D3_P: J4.3 U2.4
USB_D_N: U2.58 U6.167
USB_D_P: U2.59 U6.165